# Altium PCB testrack_module_breakout.PcbDoc
Units mm, origin at the board's own origin, x right, y up, seen from the top; angles counter-clockwise.
Board outline 38 x 41.25 mm, 2 copper layers (Top Layer, Bottom Layer); 3 components, 26 nets, 78 pads, 0 vias.
Unrouted connection lines stored in the file: 17.
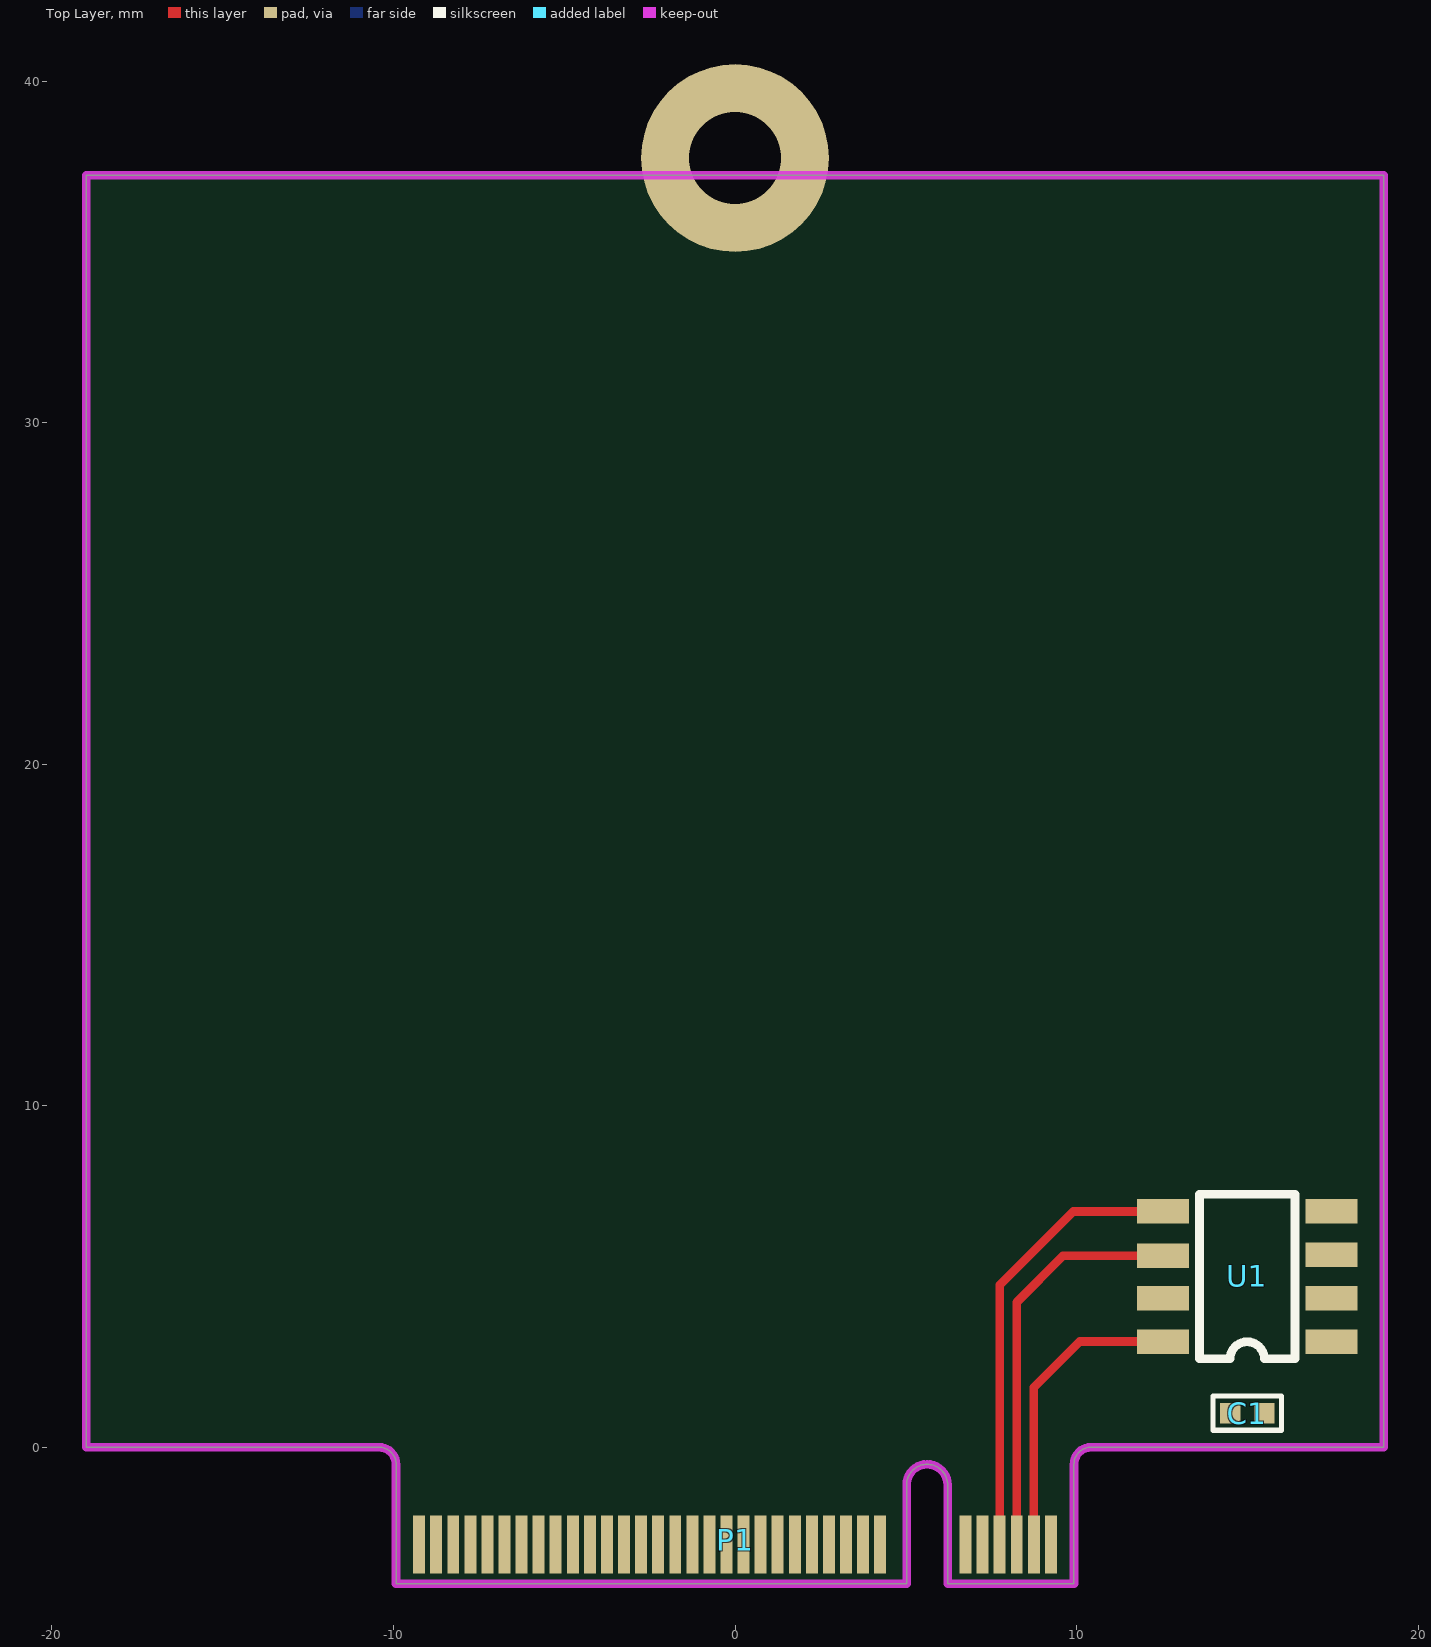
[diagram p0: Top Layer view]
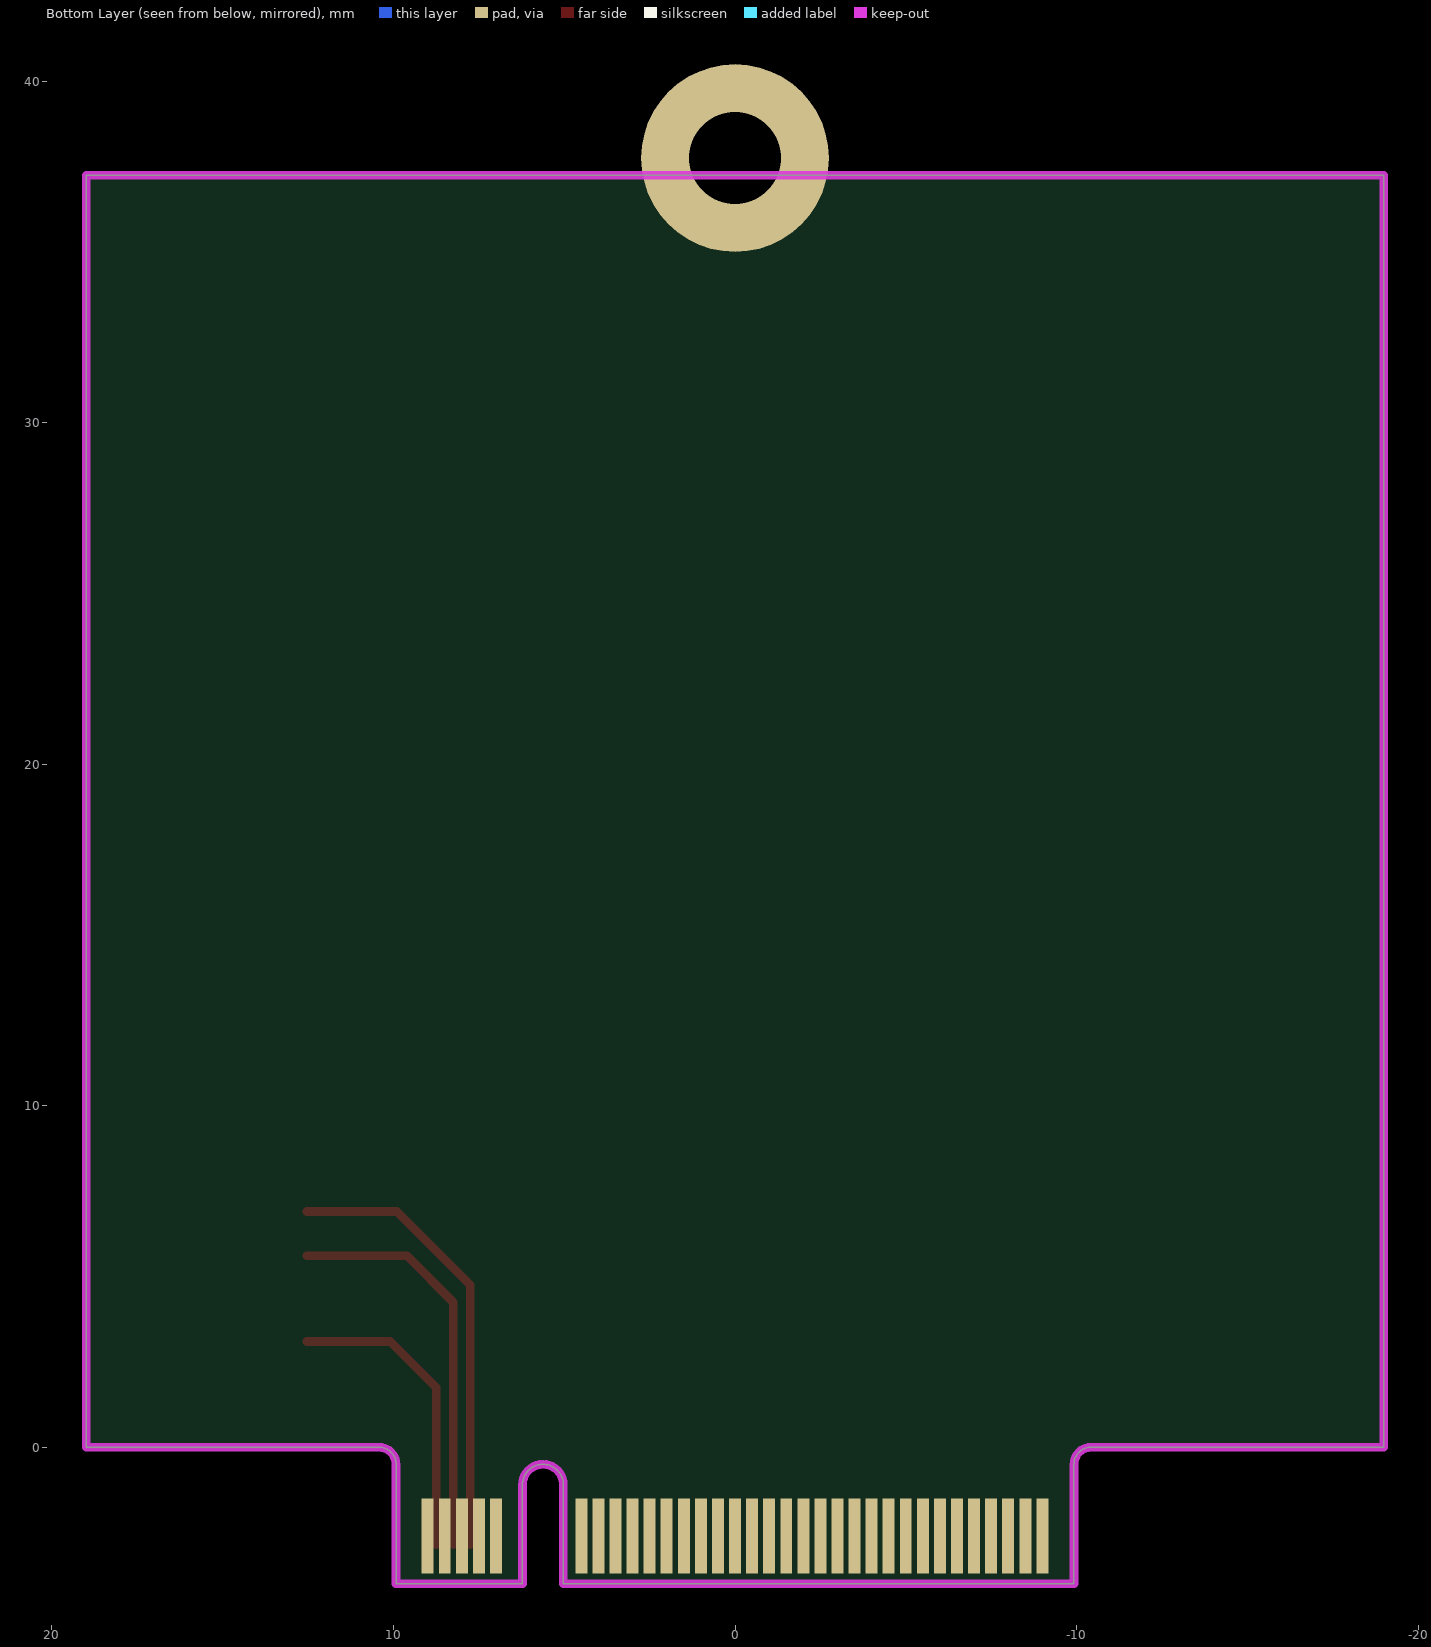
[diagram p1: Bottom Layer view, seen from below]

## Layer stack, top to bottom
Top Solder: solder mask 0.0102, Solder Resist, Dk 3.5
Top Layer: signal copper 0.0356
Dielectric 1: dielectric 0.32, FR-4, Dk 4.8
Bottom Layer: signal copper 0.0356
Bottom Solder: solder mask 0.0102, Solder Resist, Dk 3.5

## Board outline
-9.925,-4 -9.925,-0.5 ccw(c-10.425,-0.5) -10.425,0 -19,0 -19,37.25 19,37.25 19,0 10.425,0 ccw(c10.425,-0.5) 9.925,-0.5 9.925,-4 6.225,-4 6.225,-1.1 ccw(c5.625,-1.1) 5.625,-0.5 ccw(c5.625,-1.1) 5.025,-1.1 5.025,-4

## Design rules (kind name [scope] priority, off if disabled: settings)
Clearance [All] p1: gap=0.127
ComponentClearance [All] p1: gap=0 collisioncheckmode=3 verticalgap=0.254 showdistances=FALSE
DiffPairsRouting [All] p1: maxlimit=0.254 minlimit=0.254 mostfreqgap=0.254 toplayer_minwidth=0.381 toplayer_maxwidth=0.381 toplayer_prefwidth=0.381 bottomlayer_minwidth=0.381 bottomlayer_maxwidth=0.381 bottomlayer_prefwidth=0.381 maxuncoupledlength=12.7
PolygonConnect PolygonConnect_via [IsVia] p1: connectstyle=Direct reliefconductorwidth=0.254 reliefentries=4 polygonreliefangle="90 Angle" airgapwidth=0.254
PolygonConnect [All] p2: connectstyle=Relief reliefconductorwidth=0.254 reliefentries=4 polygonreliefangle="90 Angle" airgapwidth=0.152
RoutingVias [All] p1: holewidth=0.254 width=0.508 viastyle="Through Hole" minholewidth=0.254 minwidth=0.508 maxholewidth=0.711 maxwidth=1.27
SolderMaskExpansion SolderMaskExpansion_via [IsVia] p1: expansion=-0.508
SolderMaskExpansion [All] p2: expansion=0.102
Width [All] p1: maxlimit=1.27 minlimit=0.152 preferedwidth=0.152
28 further rules are at their usual default settings.

## Classes and differential pairs
differential pair D: +D_P -D_N

## Components (designator, comment, footprint, x,y, rotation, side; value= is the part's Value field where it differs from the comment)
C1 "100nF" 0402 15,1 r180 top
P1 "M.2_B" M.2_B_EDGE 0,0 r0 top locked
U1 "24Cxx" SO8 15,5 r90 top

## Footprints (in the part's own frame and the unit in brackets; to place one, negate y for a bottom-side part, rotate by r counter-clockwise, add the part's x,y. Pads: shape width x height; smd on the part's side, far side on the other; paste and mask are expansions set on the pad)
0402 [mm]
  rect 0.6x0.6 smd: 1(-0.5,0) 2(0.5,0)
  silkscreen extent -1,-0.5 1,0.5, body extent -0.5,-0.25 0.5,0.25, height 0.4
M.2_B_EDGE [mm] "M.2 Card edge, B-key"
  rect 0.35x1.7 smd paste-1: 1(9.25,-2.85) 3(8.75,-2.85) 5(8.25,-2.85) 7(7.75,-2.85) 9(7.25,-2.85) 11(6.75,-2.85) 21(4.25,-2.85) 23(3.75,-2.85) 25(3.25,-2.85) 27(2.75,-2.85) 29(2.25,-2.85) 31(1.75,-2.85) 33(1.25,-2.85) 35(0.75,-2.85) 37(0.25,-2.85) 39(-0.25,-2.85) 41(-0.75,-2.85) 43(-1.25,-2.85) 45(-1.75,-2.85) 47(-2.25,-2.85) 49(-2.75,-2.85) 51(-3.25,-2.85) 53(-3.75,-2.85) 55(-4.25,-2.85) 57(-4.75,-2.85) 59(-5.25,-2.85) 61(-5.75,-2.85) 63(-6.25,-2.85) 65(-6.75,-2.85) 67(-7.25,-2.85) 69(-7.75,-2.85) 71(-8.25,-2.85) 73(-8.75,-2.85) 75(-9.25,-2.85)
  rect 0.35x2.2 smd far side paste-1: 2(9,-2.6) 4(8.5,-2.6) 6(8,-2.6) 8(7.5,-2.6) 10(7,-2.6) 20(4.5,-2.6) 22(4,-2.6) 24(3.5,-2.6) 26(3,-2.6) 28(2.5,-2.6) 30(2,-2.6) 32(1.5,-2.6) 34(1,-2.6) 36(0.5,-2.6) 38(0,-2.6) 40(-0.5,-2.6) 42(-1,-2.6) 44(-1.5,-2.6) 46(-2,-2.6) 48(-2.5,-2.6) 50(-3,-2.6) 52(-3.5,-2.6) 54(-4,-2.6) 56(-4.5,-2.6) 58(-5,-2.6) 60(-5.5,-2.6) 62(-6,-2.6) 64(-6.5,-2.6) 66(-7,-2.6) 68(-7.5,-2.6) 70(-8,-2.6) 72(-8.5,-2.6) 74(-9,-2.6)
SO8 [mil]
  rect 28.35x60 smd: 1(-75,-97) 2(-25,-97) 3(25,-97) 4(75,-97) 5(75,97) 6(23.82,97) 7(-25,97) 8(-75,97)
  silkscreen extent -95,-55 95,55

## Part data
C1: library part Capacitor

## Free pads (board coordinates)
  round 5.5 hole 2.7: ""(0,37.75)

## Nets (pads, with @x,y where several pads share a name; then routed paths per layer and width w, separated by ;. In a path a pad name is that pad's centre, name@x,y a point inside that pad or via, vN(x,y) a via of type N, cw(c..) or ccw(c..) an arc to the next point about the centre after c; other vN are vias at no path point)
D_N: P1.36
D_P: P1.34
GND: C1.1 P1.1 P1.2 P1.10 P1.11 P1.20 P1.21 P1.32 P1.33 P1.38 P1.39 P1.56 P1.57 P1.74 P1.75 U1.4
GPIO0: P1.40
GPIO1: P1.42
GPIO2: P1.44
GPIO3: P1.46
GPIO4: P1.48
GPIO5: P1.50
GPIO6: P1.52
GPIO7: P1.54
JTCK: P1.25
JTDI: P1.29
JTDO: P1.27
JTMS: P1.23
MGMT_SCL: P1.5 U1.6 | length 11.9
  Top Layer w0.254: P1.5 8.25,4.25 9.605,5.605 U1.6
MGMT_SDA: P1.7 U1.5 | length 13.3
  Top Layer w0.254: P1.7 7.75,4.75 9.905,6.905 U1.5
NRST: P1.31
TRACECLK: P1.22
TRACED0: P1.24
TRACED1: P1.26
TRACED2: P1.28
TRACED3: P1.30
VIN: P1.4 P1.6
VMGMT: C1.2 P1.3 U1.8 | length 8.9
  Top Layer w0.254: P1.3 8.75,1.75 10.095,3.095 U1.8
VTREF: P1.8
pads on no net: P1.9 P1.35 P1.37 P1.41 P1.43 P1.45 P1.47 P1.49 P1.51 P1.53 P1.55 P1.58 P1.59 P1.60 P1.61 P1.62 P1.63 P1.64 P1.65 P1.66 P1.67 P1.68 P1.69 P1.70 P1.71 P1.72 P1.73 U1.1 U1.2 U1.3 U1.7

## Keep-outs
Keep-Out Layer:
  the board outline again, w0.254